# Altium PCB PCB.PcbDoc
Units mm, origin at the board's own origin, x right, y up, seen from the top; angles counter-clockwise.
Board outline 19.6 x 8 mm, 2 copper layers (Top Layer, Bottom Layer); 16 components, 12 nets, 44 pads, 6 vias.
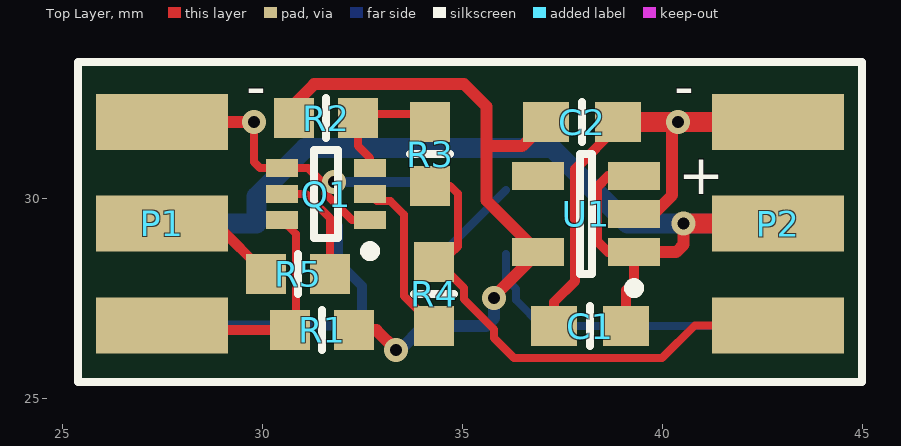
[diagram p0: Top Layer view]
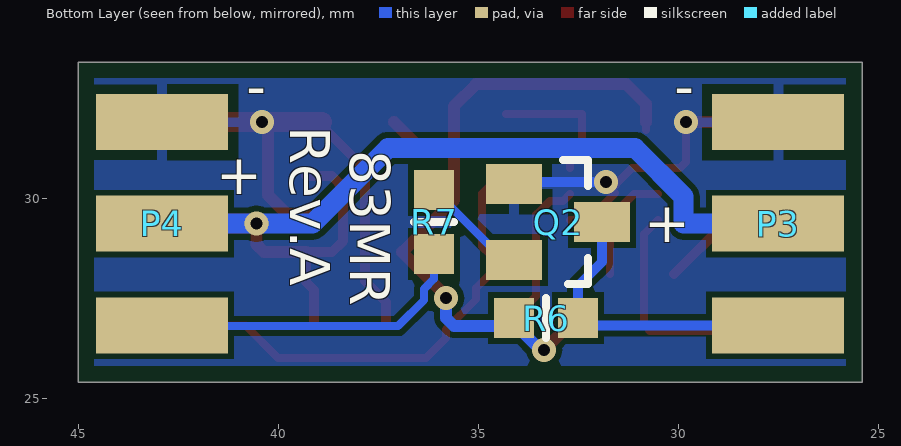
[diagram p1: Bottom Layer view, seen from below]
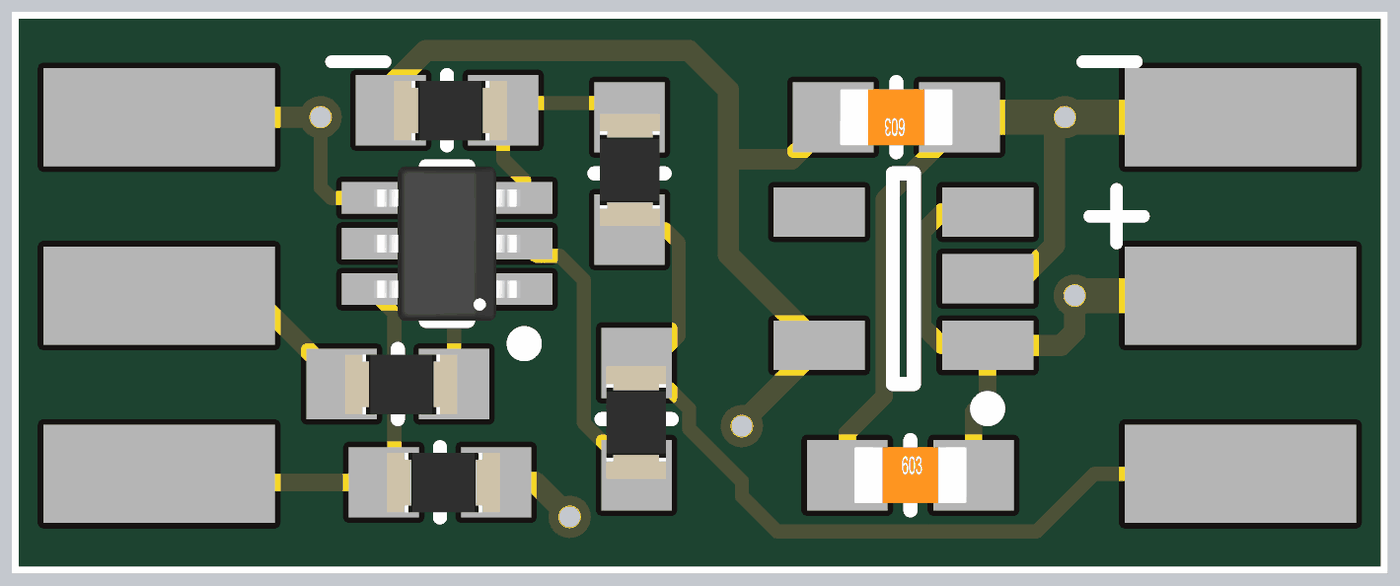
[diagram p2: 3D render of the assembled board from above, using the file's embedded part models]

## Layer stack, top to bottom
Top Solder: solder mask 0.0102, Solder Resist, Dk 3.5
Top Layer: signal copper 0.0356
Dielectric 1: dielectric 0.32, FR-4, Dk 4.8
Bottom Layer: signal copper 0.0356
Bottom Solder: solder mask 0.0102, Solder Resist, Dk 3.5

## Board outline
25.4,25.4 45,25.4 45,33.4 25.4,33.4

## Design rules (kind name [scope] priority, off if disabled: settings)
BoardOutlineClearance [All] p1: gap=0.4
Clearance [All] p1: gap=0.152
HoleSize [All] p1: absolutevalues=TRUE maxlimit=6.35 minlimit=0.3 maxpercent=80.000 minpercent=20.000
HoleToHoleClearance [All] p1: gap=0.2 allowstackedmicrovias=FALSE
MinimumSolderMaskSliver [All] p1: minsoldermaskwidth=0.1
PolygonConnect PolygonConnect_1 [IsVia] p1: connectstyle=Direct reliefconductorwidth=0.25 reliefentries=4 polygonreliefangle="90 Angle" airgapwidth=0.25
PolygonConnect [All] p2: connectstyle=Relief reliefconductorwidth=0.25 reliefentries=4 polygonreliefangle="90 Angle" airgapwidth=0.25
RoomDefinition SPort_SBUS [InComponentClass('SPort_SBUS')] p1: confinementstyle=ConfineOut formatcopy=TRUE lockcomponents=FALSE outline 178.943,26.924 236.601,26.924 236.601,34.036 178.943,34.036
RoutingVias [All] p1: holewidth=0.3 width=0.5 viastyle="Through Hole" minholewidth=0.3 minwidth=0.5 maxholewidth=6.35 maxwidth=6
SilkToSilkClearance [All] p1: silktosilkclearance=0
SilkToSolderMaskClearance [IsPad] p1: minsilkscreentomaskgap=0.178 clearancetoexposedcopper=TRUE
SolderMaskExpansion SolderMaskExpansion_1 [InComponent('U1')] p1: expansion=0.07
SolderMaskExpansion SolderMaskExpansion_2 [InComponent('Q1')] p2: expansion=0.05
SolderMaskExpansion [All] p3: expansion=0.08
Width [All] p1: maxlimit=6 minlimit=0.152 preferedwidth=0.2
25 further rules are at their usual default settings.

## Components (designator, comment, footprint, x,y, rotation, side; value= is the part's Value field where it differs from the comment)
C1 "Capacitor" 0603_CAP 38.2,26.8 r0 top
C2 "Capacitor" 0603_CAP 38,31.9 r180 top
P1 "Header 3" Header_3 27.5,26.82 r0 top
P2 "Header 3" Header_3 42.9,26.82 r0 top
P3 "Header 3" Header_3 27.5,26.82 r180 bottom
P4 "Header 3" Header_3 42.9,26.82 r180 bottom
Q1 "PMBT3904YS" "SOT363 (SC-88)" 31.6,30.1 r180 top
Q2 "2N3904" SOT95P240X120-3M 33,29.4 r180 bottom
R1 "Resitor" 0603_RES 31.5,26.7 r180 top
R2 "Resitor" 0603_RES 31.6,32 r180 top
R3 "Resitor" 0603_RES 34.2,31.1 r270 top
R4 "Resitor" 0603_RES 34.3,27.6 r90 top
R5 "Resitor" 0603_RES 30.9,28.1 r180 top
R6 "Resitor" 0603_RES 33.3,27 r0 bottom
R7 "Resitor" 0603_RES 36.1,29.4 r270 bottom
U1 "LP2981-33DBVR" MF05A_M 38.1,29.6 r180 top

## Footprints (in the part's own frame and the unit in brackets; to place one, negate y for a bottom-side part, rotate by r counter-clockwise, add the part's x,y. Pads: shape width x height; smd on the part's side, far side on the other; paste and mask are expansions set on the pad)
0603_CAP [mm] "Chip Capacitor, 2-Leads, Body 1,60x0,80mm, IPC Low Density"
  rect 1.15x1 smd: 1(-0.9,0) 2(0.9,0)
  silkscreen extent 0,-0.5 0,0.5, body extent -0.8,-0.4 0.8,0.4, height 0.3
0603_RES [mm] "Chip Resistor, 2-Leads, Body 1,57x0,85mm, IPC Medium Density"
  rect 1x1 smd: 1(-0.8,0) 2(0.8,0)
  silkscreen extent 0,-0.5 0,0.5, body extent -0.85,-0.42 0.75,0.43, height 0.45
Header_3 [mm]
  rect 3.3x1.4 smd: 1(0,0) 2(0,2.54) 3(0,5.08)
MF05A_M [mm] "SOT23, 5-Leads, Body 2.9x1.6mm, Pitch 0.95mm, Lead Span 2.8mm, IPC Low Density"
  rect 1.3x0.7 smd: 1(-1.2,0.95) 2(-1.2,0) 3(-1.2,-0.95) 4(1.2,-0.95) 5(1.2,0.95)
  silkscreen extent -1.33,-1.5 0.15,1.97, body extent -0.83,-1.49 0.83,1.5, height 1.19
SOT95P240X120-3M [mm] "SOT23, 3-Leads, Body 2,92x2,40mm, Pitch 0,95mm, IPC Low Density"
  rect 1.4x1 smd: 1(-1.1,0.95) 2(-1.1,-0.95) 3(1.1,0)
  silkscreen extent 0.13,-1.55 0.75,1.55, body extent -0.75,-1.56 0.75,1.56, height 1.2
"SOT363 (SC-88)" [mm] "SOT363, 6-Leads, Body 2,00x1,25mm, Pitch 0,65mm, IPC Medium Density"
  rect 0.8x0.45 smd: 1(-1.1,0.65) 2(-1.1,0) 3(-1.1,-0.65) 4(1.1,-0.65) 5(1.1,0) 6(1.1,0.65)
  silkscreen extent -1.23,-1.1 0.3,1.55, body extent -1.04,-1.1 1.04,1.1, height 1.1

## Part data
P1 P2 P3 P4: "Header, 3-Pin"
Q2: "NPN General Purpose Amplifier"
U1: library part CMP-0062-02157-2, "Micropower 100 mA Ultra Low-Dropout Regulator, 5-pin SOT-23"

## Via types
v1: diameter 0.6, hole 0.3, Top Layer to Bottom Layer, tented both sides, 6 vias

## Nets (pads, with @x,y where several pads share a name; then routed paths per layer and width w, separated by ;. In a path a pad name is that pad's centre, name@x,y a point inside that pad or via, vN(x,y) a via of type N, cw(c..) or ccw(c..) an arc to the next point about the centre after c; other vN are vias at no path point)
3.3V: C2.2 R1.1 R2.2 R6.2 U1.5 | length 18.1
  Top Layer w0.2: R2.2@30.8,31.7 R2.2@30.8,31.9
  Top Layer w0.3: R2.2@30.8,31.9 R2.2 30.8,32.35 31.3,32.85 35.05,32.85 35.607,32.293 35.607,31.3 ; R1.1 32.855,26.7 v1(33.348,26.208) v1@33.348,26.252 ; v1@33.332,26.268 v1@33.348,26.252 ; v1@33.4,26.2 v1@33.348,26.252 ; v1(35.8,27.5) 35.8,27.55 U1.5 35.607,29.943 35.607,31.3 ; C2.2 36.5,31.3 35.607,31.3
  Bottom Layer w0.3: v1@33.332,26.228 v1@33.348,26.213 ; v1(33.348,26.208) v1@33.348,26.213 ; R6.2@34.07,26.83 33.4,26.16 v1@33.348,26.213 ; R6.2@34.1,26.8 35.6,26.8 35.8,27 v1(35.8,27.5)
GND: C1.1 C2.1 P1.3 P2.3 P3.3 P4.3 Q1.1 Q1.4 Q2.1 U1.2 | length 22.1
  Top Layer w0.2: v1(29.8,31.9) 29.8,30.9 29.95,30.75 Q1.4 31.15,30.75 v1@31.575,30.325 ; 31.575,30.122 32.247,29.45 Q1.1
  Top Layer w0.25: v1@31.575,30.325 31.6,30.3 31.7,30.4 v1(31.8,30.4) ; C1.1@37.3,26.9 37.3,27.4 37.827,27.927 37.827,30.727 38.9,31.8 C2.1
  Top Layer w0.3: P1.3 v1(29.8,31.9) ; U1.2 39.778,29.6 40.252,30.075 40.252,31.752 v1(40.4,31.9)
  Top Layer w0.5: C2.1 v1(40.4,31.9) P2.3
  Bottom Layer w0.25: v1(31.8,30.4) 33.95,30.4 Q2.1@34.1,30.25
NetQ1_2: Q1.2 R4.1 | length 4.2
  Top Layer w0.2: Q1.2 32.873,29.927 33.205,29.927 33.548,29.584 33.548,27.552 R4.1
NetQ1_3: Q1.3 R2.1 R3.1 | length 3.4
  Top Layer w0.2: Q1.3 32.7,31 32.4,31.3 32.4,32.1 R3.1@34.3,32.1
NetQ1_5: Q1.5 R5.1 | length 2.8
  Top Layer w0.2: Q1.5 31.098,30.1 31.7,29.498 R5.1
NetQ2_2: Q2.2 R7.1 | length 3.1
  Bottom Layer w0.2: Q2.2@34.35,28.6 34.1,28.35 34.25,28.35 R7.1
SBUS: P4.1 R7.2 | length 8.1
  Bottom Layer w0.2: R7.2 36.1,27.981 36.352,27.729 36.352,27.448 37,26.8 42.88,26.8 P4.1
SPORT: P2.1 R3.2 R4.2 | length 13.3
  Top Layer w0.2: R3.2@34.3,30.5 34.3,30.305 34.704,30.305 34.9,30.109 34.9,28.791 34.704,28.595 34.3,28.595 R4.2 34.4,28.4 35.048,27.752 35.048,27.471 35.8,26.719 35.8,26.5 36.3,26 40,26 40.82,26.82 P2.1
SPORT_RXD: P1.1 Q1.6 R1.2 | length 6.2
  Top Layer w0.2: Q1.6 30.852,29.098 30.852,26.852 R1.2
  Top Layer w0.25: P1.1 27.62,26.7 R1.2
SPORT_TXD: P1.2 R5.2 | length 3.1
  Top Layer w0.25: P1.2 28.84,29.36 R5.2
USART2_RXD: P3.1 Q2.3 R6.1 | length 7.7
  Bottom Layer w0.25: P3.1 32.42,26.82 32.5,26.9 R6.1 32.5,27.8 31.9,28.4 Q2.3@31.9,29.3
V_IN: C1.2 P2.2 P3.2 P4.2 U1.1 U1.3 | length 26.8
  Top Layer w0.25: C1.2@39.1,26.9 39.1,27.7 39.3,27.9 U1.1 38.65,28.65 38.373,28.927 38.373,30.273 38.65,30.55 U1.3
  Top Layer w0.3: U1.1 40.35,28.65 40.54,28.84 v1(40.54,29.36)
  Top Layer w0.5: v1(40.54,29.36) P2.2
  Bottom Layer w0.5: P3.2 29.86,29.36 29.86,30.034 31.079,31.252 37.248,31.252 39.14,29.36 v1(40.54,29.36) P4.2
pads on no net: U1.4

## Polygon pours and split planes (outlines as drawn)
GND on Bottom Layer "GND_L02_P000" (solid, pour order 0): 25.6,33.2 44.8,33.2 44.8,25.6 25.7,25.6

## Silkscreen, mask and mechanical layers (free items; w line width, h text height)
Top Overlay:
  the board outline again, w0.2
  text "-" at 29.6,32.3 h1
  text "-" at 40.3,32.3 h1
  text "+" at 40.4,30.1 h1
Bottom Overlay:
  text "-" at 29.6,32.3 h1
  text "-" at 40.3,32.3 h1
  text "Rev.A" at 39.7,31.8 h1 r90
  text "83MR" at 38.2,31.2 h1 r90
  text "+" at 40.4,30.1 h1
  text "+" at 29.7,28.9 h1
Mechanical 1:
  the board outline again, w0.254